# Altium PCB MainBoard.PcbDoc (part 1 of 2)
Units mm, origin at the board's own origin, x right, y up, seen from the top; angles counter-clockwise.
Board outline 110.87 x 110.11 mm, 4 copper layers (Top Layer, Signal Layer 1, Signal Layer 2, Bottom Layer), stack 0.971 mm thick; 104 components, 160 nets, 547 pads, 193 vias.
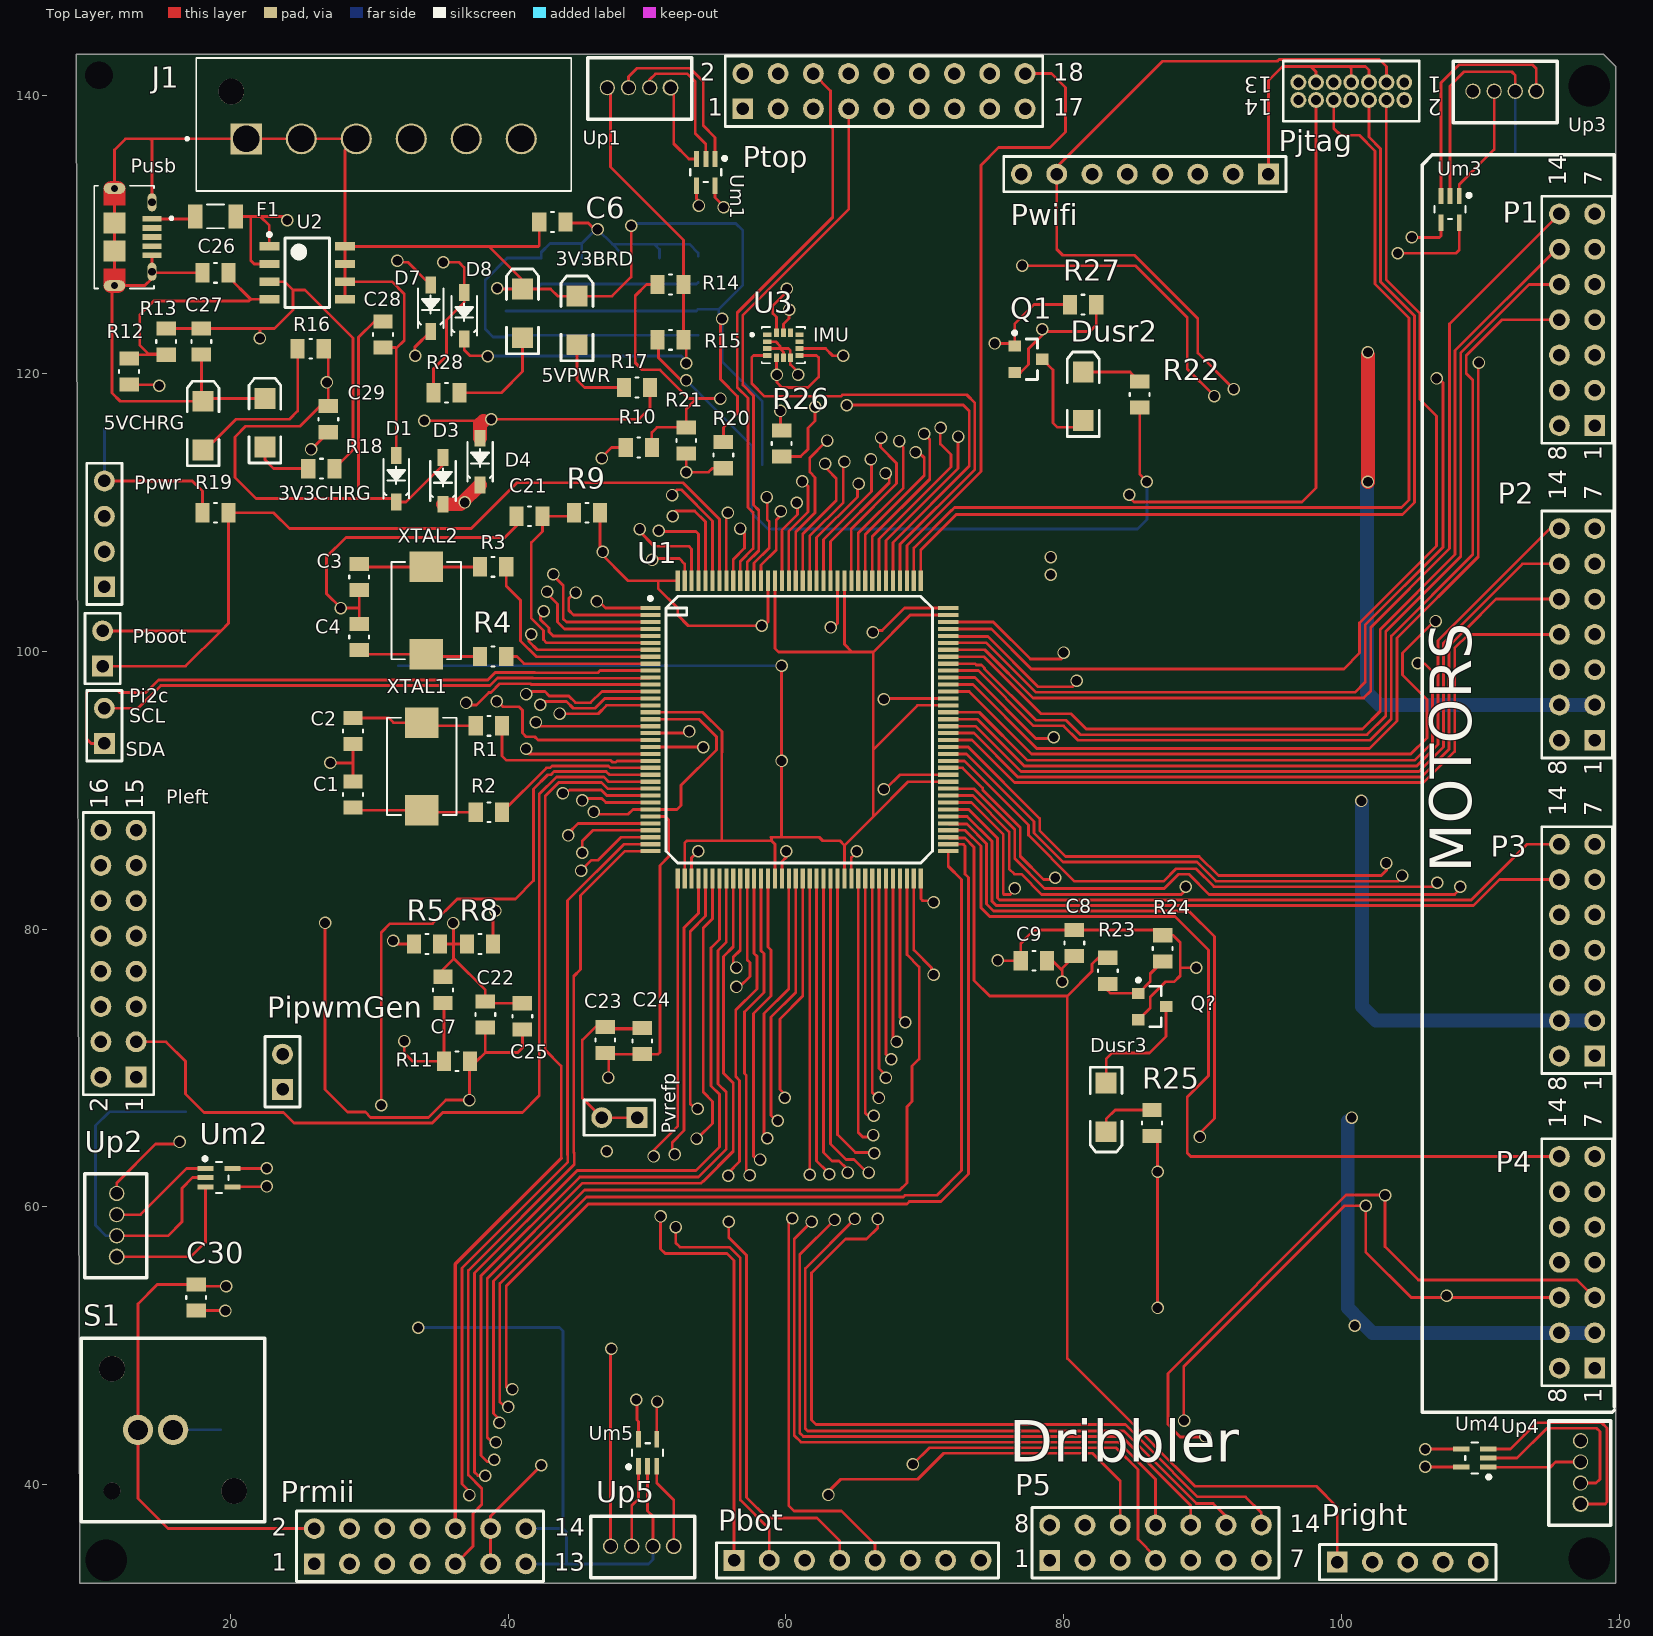
[diagram p0: Top Layer view]
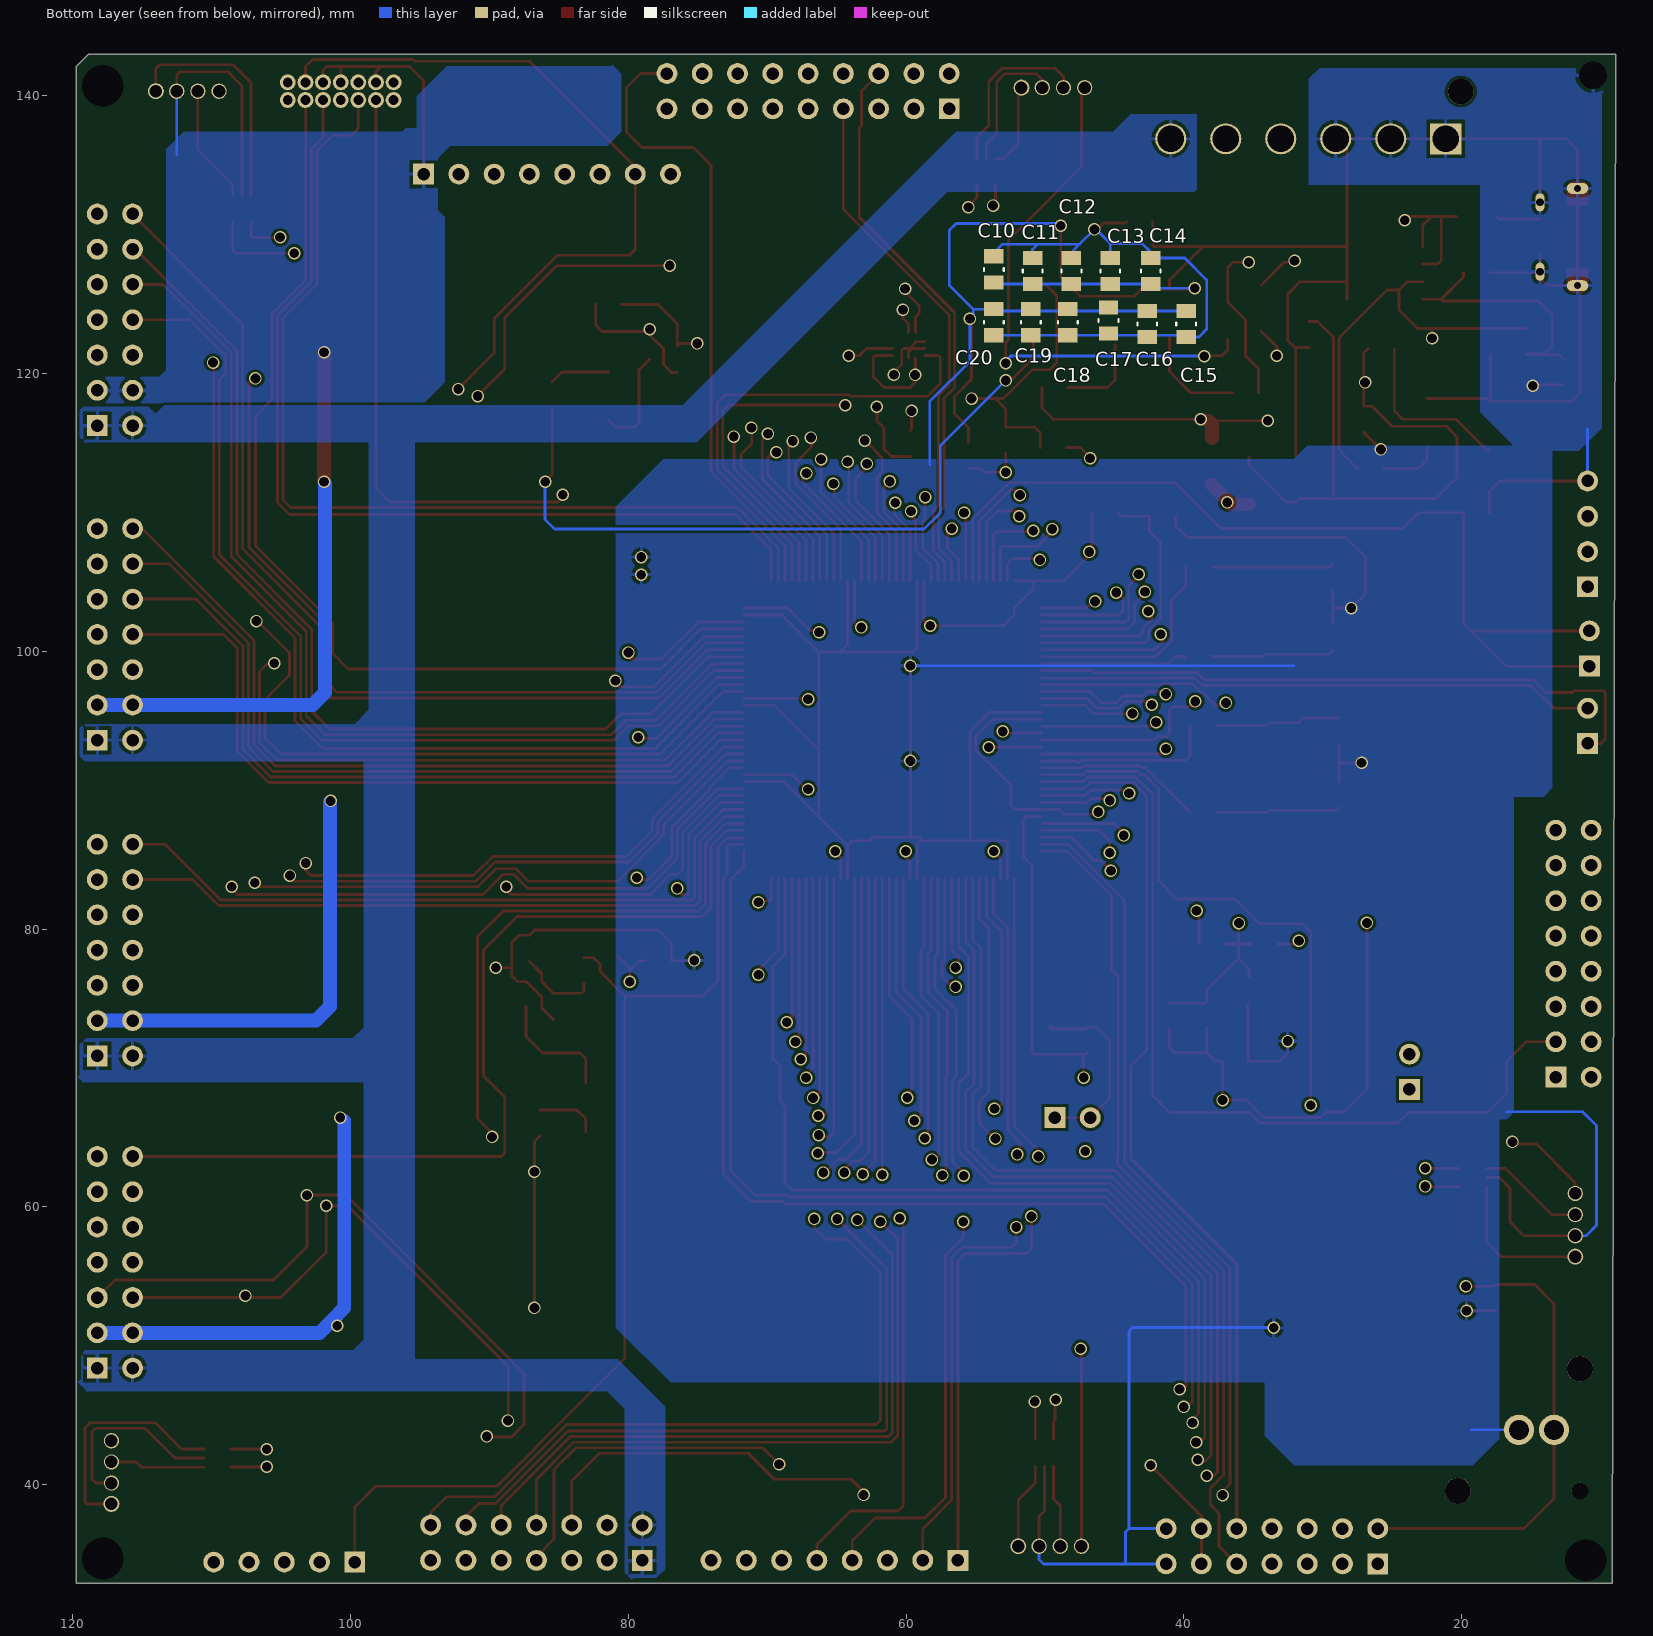
[diagram p1: Bottom Layer view, seen from below]
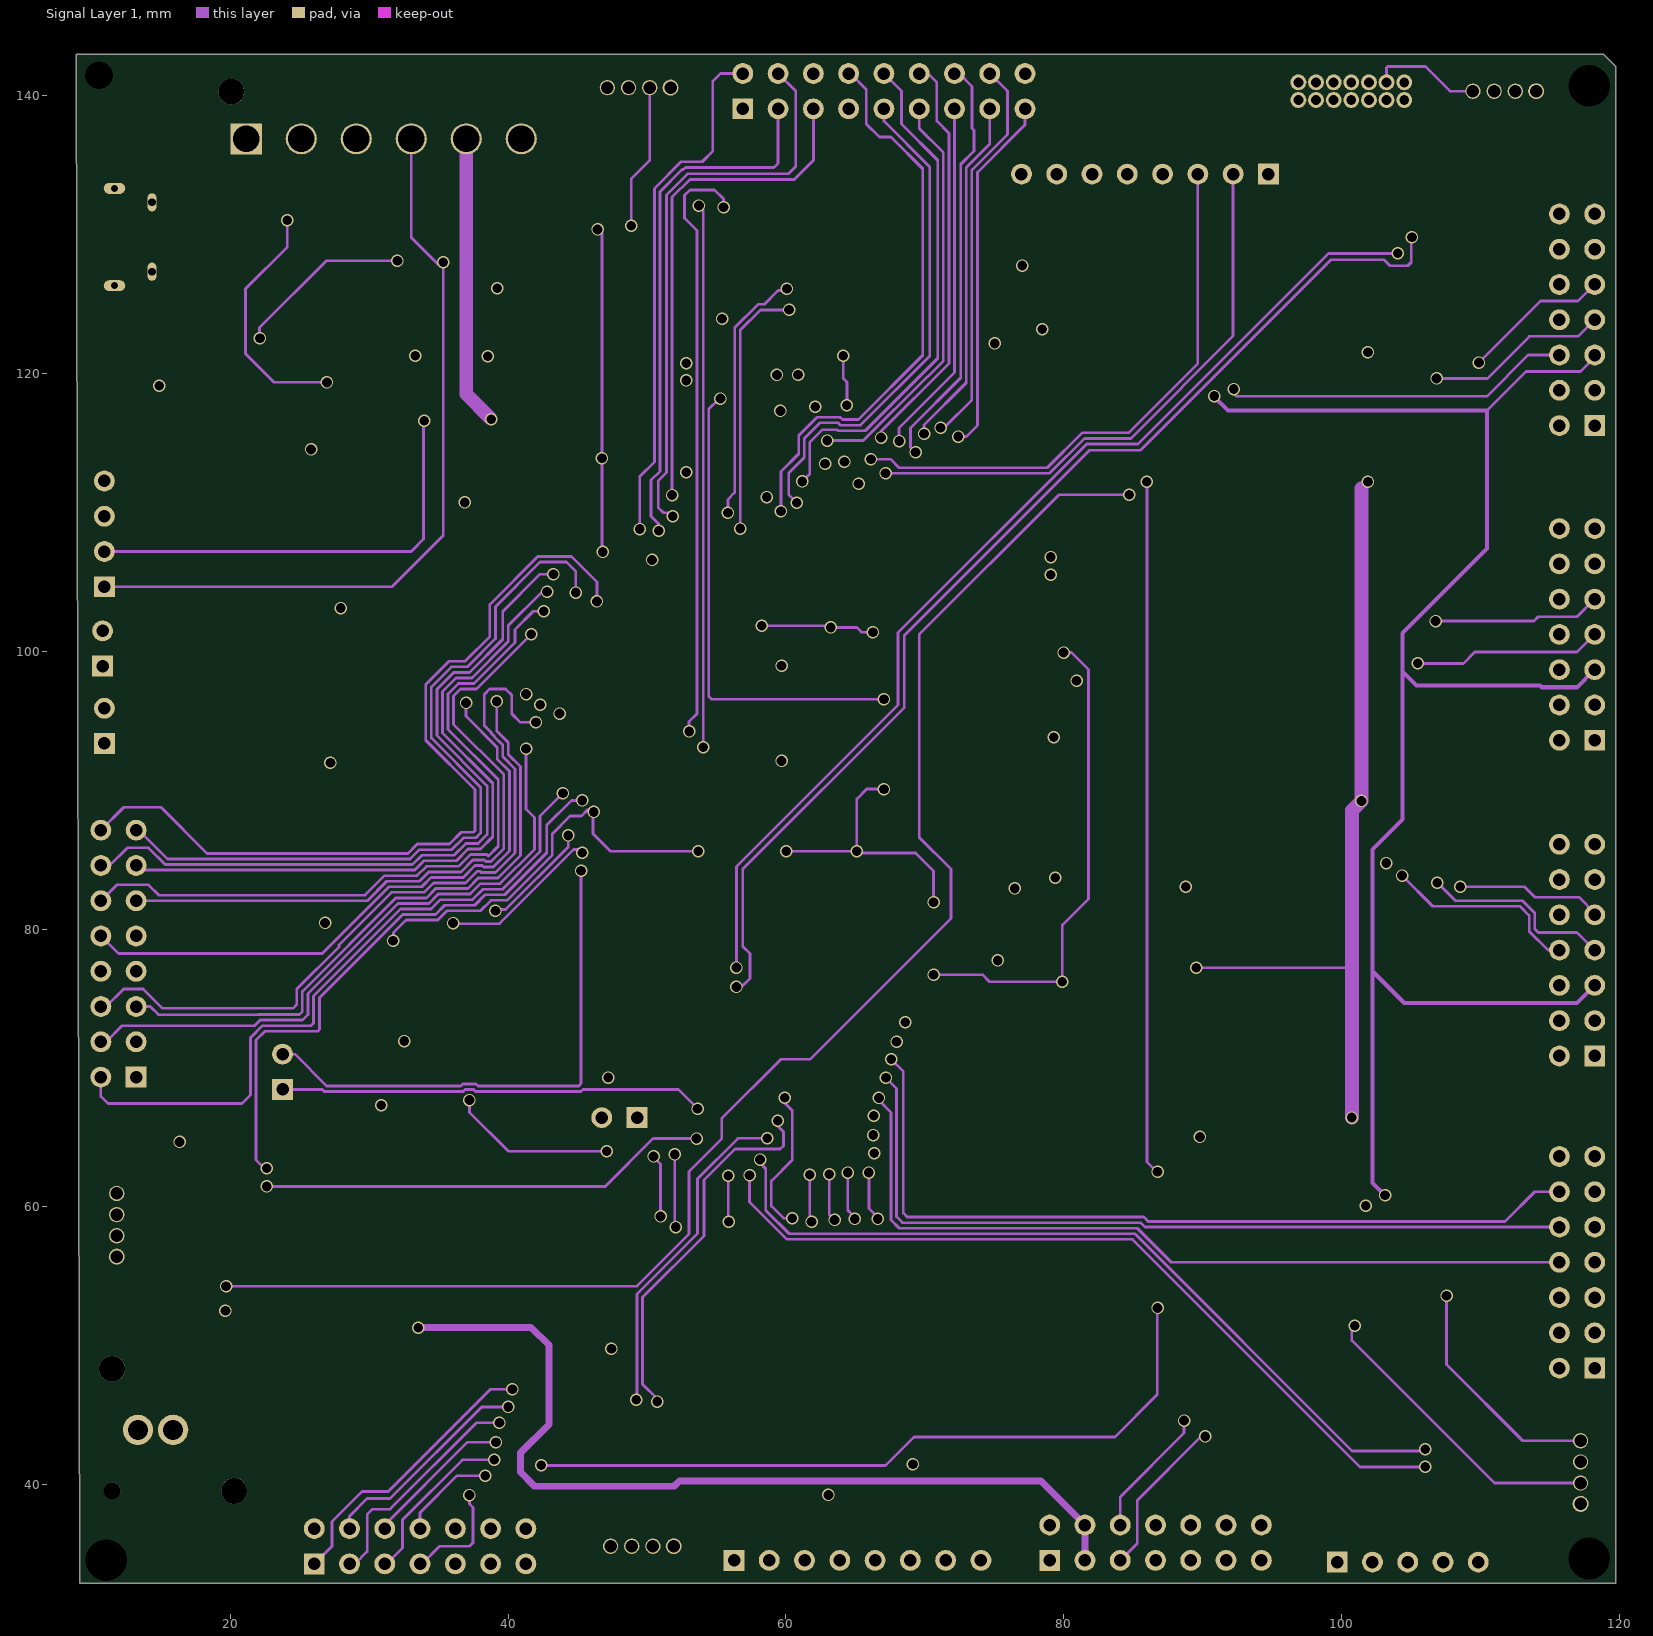
[diagram p2: Signal Layer 1]
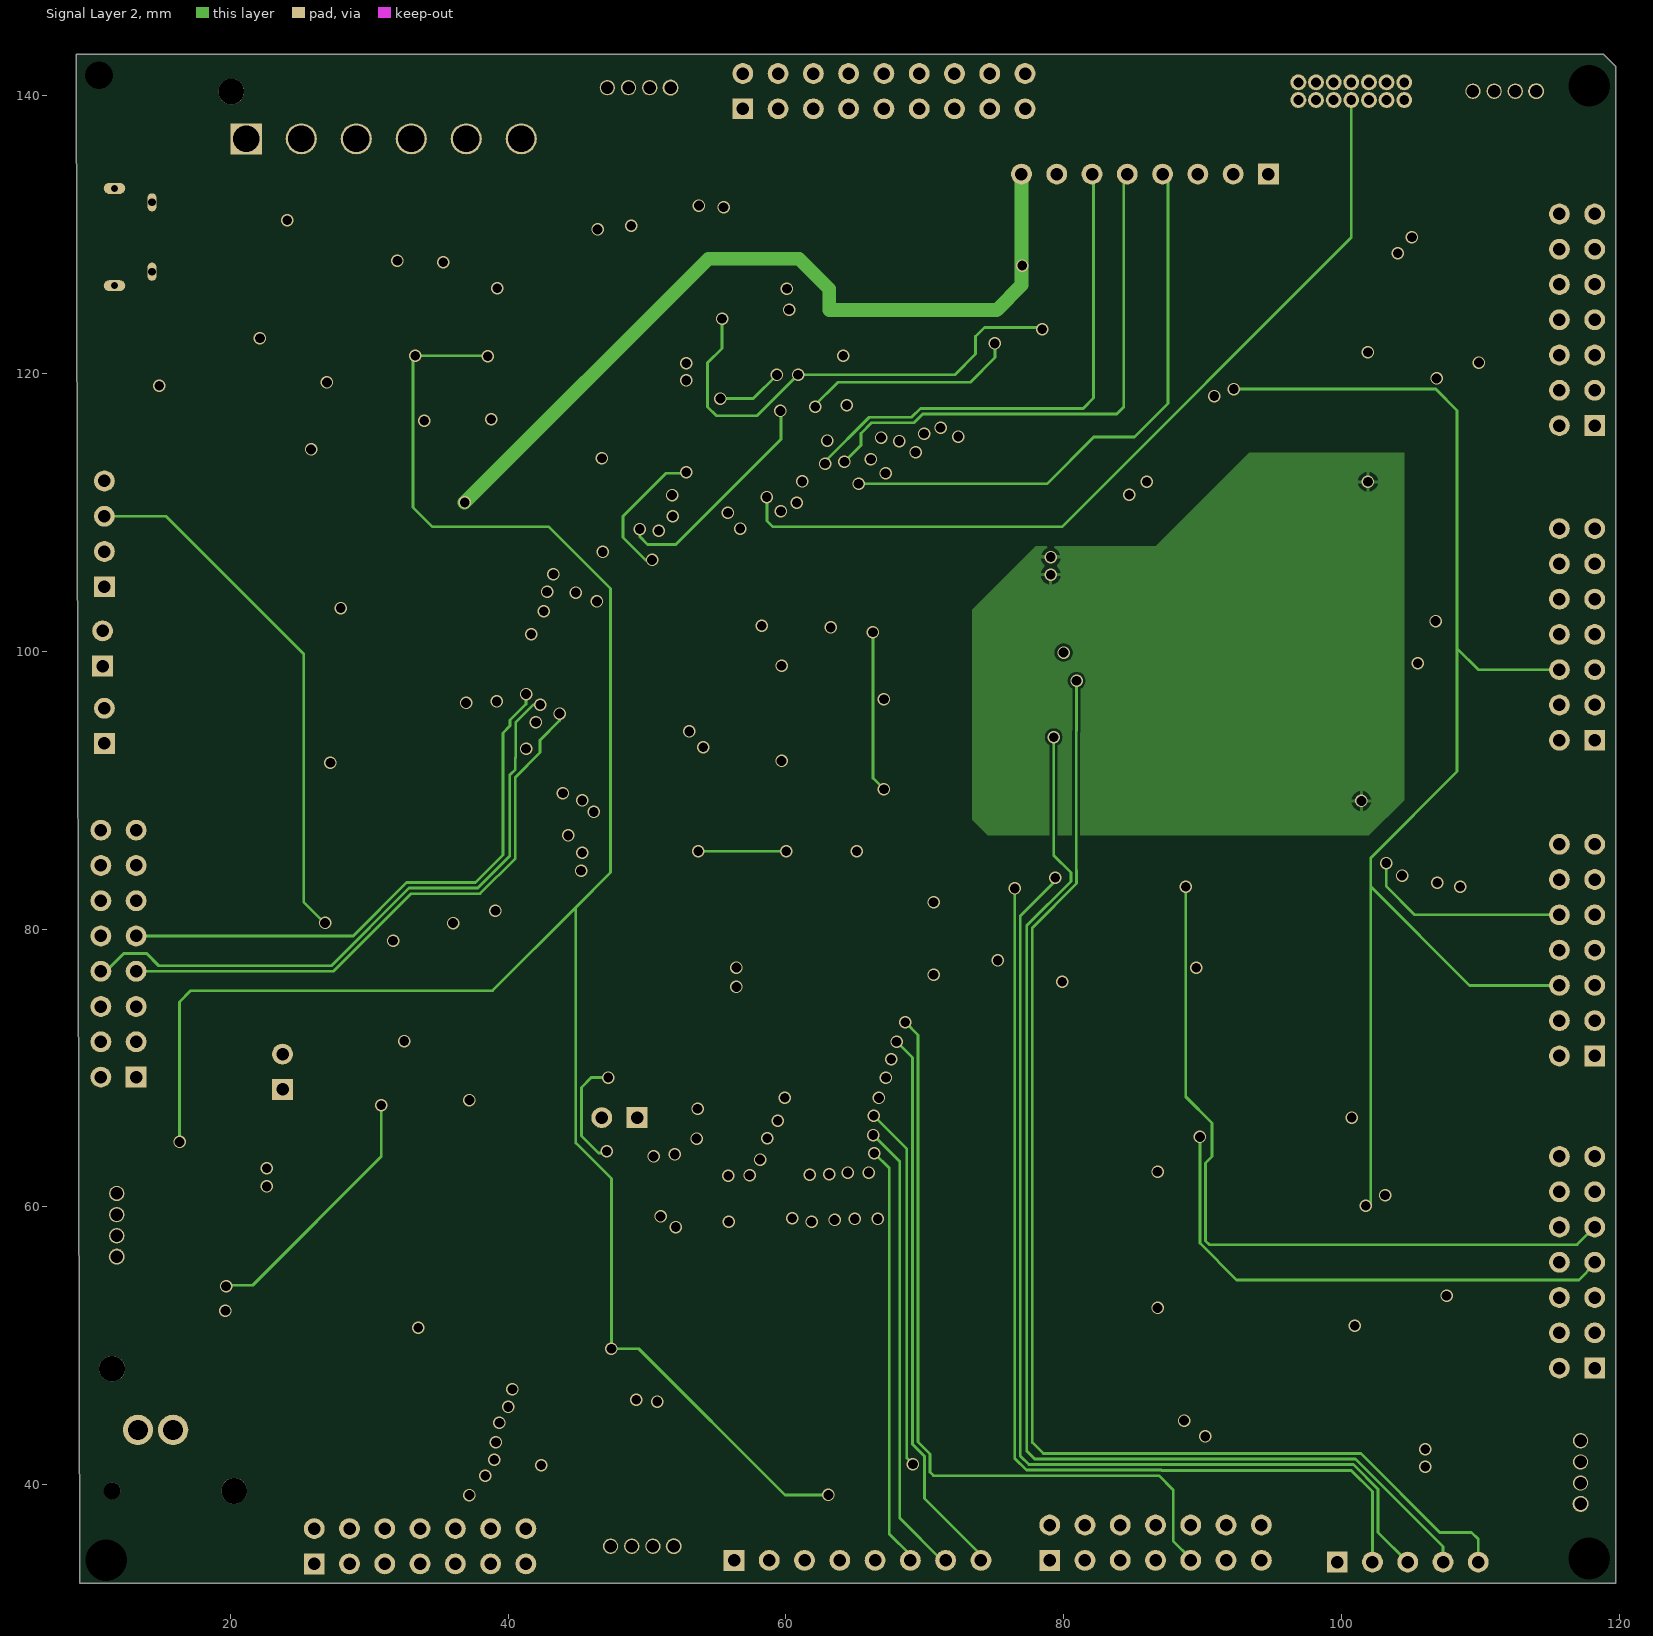
[diagram p3: Signal Layer 2]

## Layer stack, top to bottom
Top Solder: solder mask 0.0102, Solder Resist, Dk 3.5
Top Layer: signal copper 0.0356
Dielectric 1: dielectric 0.32, FR-4, Dk 4.8
Signal Layer 1: signal copper 0.036
Dielectric 2: dielectric 0.254, Dk 4.2
Signal Layer 2: signal copper 0.036
Dielectric 3: dielectric 0.254, Dk 4.2
Bottom Layer: signal copper 0.0356
Bottom Solder: solder mask 0.0102, Solder Resist, Dk 3.5

## Board outline
8.89,143.002 118.872,143.002 119.761,142.113 119.761,32.893 9.144,32.893

## Design rules (kind name [scope] priority, off if disabled: settings)
Clearance [All] p1: gap=0.2 ignorepadtopadclearanceinfootprint=FALSE except(0: Arc-Hole Track-Hole SMDPad-Hole THPad-Hole Via-Hole Fill-Hole Poly-Hole Region-Hole Text-Hole; 0.125: SMDPad-SMDPad SMDPad-THPad THPad-THPad)
HoleSize [All] p1: absolutevalues=TRUE maxlimit=4 minlimit=0.025 maxpercent=80.000 minpercent=20.000
MinimumSolderMaskSliver [All] p1: minsoldermaskwidth=0.021
PolygonConnect [All] p1: connectstyle=Relief reliefconductorwidth=0.254 reliefentries=4 polygonreliefangle="90 Angle" airgapwidth=0.254
RoomDefinition U_MCUUSB [InComponentClass('U_MCUUSB')] p1: confinementstyle=ConfineIn formatcopy=TRUE lockcomponents=FALSE outline 0,149.098 0,117.856 20.32,117.856 22.479,120.015 22.479,148.59 21.717,149.352 0.381,149.352
RoomDefinition U_MCUIOs [InComponentClass('U_MCUIOs')] p2: confinementstyle=ConfineIn formatcopy=TRUE lockcomponents=FALSE outline 5.969,144.526 5.969,30.226 123.063,30.226 123.19,30.099 123.19,144.145 123.317,144.272
RoomDefinition U_MCUCONN [InComponentClass('U_MCUCONN')] p3: confinementstyle=ConfineIn formatcopy=TRUE lockcomponents=FALSE outline 5.715,144.526 5.715,29.845 5.588,29.718 123.952,29.718 123.952,143.891 123.444,144.399
RoomDefinition U_MCU_PWR [InComponentClass('U_MCU_PWR')] p4: confinementstyle=ConfineIn formatcopy=TRUE lockcomponents=FALSE outline 5.207,147.701 5.207,26.67 4.953,26.416 125.222,26.416 125.222,145.415 124.714,145.923
RoomDefinition MainBoard_Top [InComponentClass('MainBoard_Top')] p5: confinementstyle=ConfineIn formatcopy=TRUE lockcomponents=FALSE outline 0,156.464 0.127,156.337 0.127,22.479 127.762,22.479 127.762,153.797 127.635,153.924
RoutingVias [All] p1: holewidth=0.711 width=1.27 viastyle="Through Hole" minholewidth=0.711 minwidth=1.27 maxholewidth=0.711 maxwidth=1.27
SilkToSilkClearance [All] p1: silktosilkclearance=0.05
SilkToSolderMaskClearance [IsPad] p1: minsilkscreentomaskgap=0.1 clearancetoexposedcopper=TRUE
SolderMaskExpansion [All] p1: expansion=0.102
Width [All] p1: maxlimit=2 minlimit=0.2 preferedwidth=0.2
26 further rules are at their usual default settings.

## Classes and differential pairs
component class U_MCUUSB: Pusb
component class U_MCUIOs: C1 C2 C3 C4 C30 HW? P1 P2 P3 P4 P5 Pbot Pi2c PipwmGen Pleft Pright Ptop Pwifi R1 R2 R3 R4 R19 R20 R21 S1 U1 U3 XTAL1 XTAL2
component class U_MCUCONN: Dusr2 Dusr3 J1 Pjtag Ppwr Prmii Q1 Q? R22 R23 R24 R25 R26 R27 Um1 Um2 Um3 Um4 Um5 Up1 Up2 Up3 Up4 Up5
component class U_MCU_PWR: 1 3V3BRD 3V3CHRG 5VCHRG 5VPWR C6 C7 C8 C9 C10 C11 C12 C13 C14 C15 C16 C17 C18 C19 C20 C21 C22 C23 C24 C25 C26 C27 C28 C29 D1 D3 D4 D7 D8 F1 Pvrefp R5 R8 R9 R10 R11 R12 R13 R14 R15 R16 R17 R18 R28 TP? U2
component class MainBoard_Top: Pboot

## Components (designator, comment, footprint, x,y, rotation, side; value= is the part's Value field where it differs from the comment)
3V3BRD "LED2" 3.2X1.6X1.1 41.029,124.333 r90 top (schematic designator Dled3v3BRD)
3V3CHRG "LED2" 3.2X1.6X1.1 22.479,116.459 r90 top (schematic designator Dled3V3CHRG)
5VCHRG "LED2" 3.2X1.6X1.1 18.034,116.256 r90 top (schematic designator Dled5VCHRG)
5VPWR "LED2" 3.2X1.6X1.1 44.958,123.825 r90 top (schematic designator Dled5VPWR)
C1 "5.6pF" 0805 28.829,89.681 r90 top
C2 "5.6pF" 0805 28.829,94.253 r270 top
C3 "5.1pF" 0805 29.268,105.345 r270 top
C4 "5.1pF" 0805 29.268,101.027 r90 top
C6 "100nF" 0805 43.18,130.914 r0 top
C7 "100nF" 0805 35.306,75.626 r90 top
C8 "2.2uF" 0805 80.772,78.994 r270 top
C9 "2.2uF" 0805 77.851,77.724 r0 top
C10 "4.7uF" 0805 53.68,127.508 r90 bottom
C11 "100nF" 0805 50.886,127.381 r90 bottom
C12 "100nF" 0805 48.092,127.381 r90 bottom
C13 "100nF" 0805 45.298,127.381 r90 bottom
C14 "100nF" 0805 42.377,127.381 r90 bottom
C15 "100nF" 0805 39.837,123.571 r270 bottom
C16 "100nF" 0805 42.631,123.571 r270 bottom
C17 "100nF" 0805 45.425,123.825 r270 bottom
C18 "100nF" 0805 48.346,123.698 r270 bottom
C19 "100nF" 0805 51.013,123.698 r270 bottom
C20 "100nF" 0805 53.68,123.698 r270 bottom
C21 "1uF" 0805 41.529,109.728 r0 top
C22 "1uF" 0805 38.354,73.848 r90 top
C23 "1uF" 0805 46.99,72.009 r90 top
C24 "100nF" 0805 49.657,71.933 r90 top
C25 "100nF" 0805 41.021,73.721 r90 top
C26 "470pF" 0805 18.923,127.254 r0 top
C27 "2.2uF" 0805 17.907,122.301 r90 top
C28 "1uF" 0805 30.988,122.809 r270 top
C29 "1nF" 0805 27.051,116.713 r90 top
C30 "100nF" 0805 17.526,53.467 r90 top
D1 "MMSZ5245B-TP" SOD-123 31.935,112.42 r90 top
D3 "SM5817PL-TP" SOD-123 35.306,112.268 r90 top
D4 "SM5817PL-TP" SOD-123 37.973,113.665 r90 top
D7 "SM5817PL-TP" SOD-123 34.417,124.714 r90 top
D8 "SM5817PL-TP" SOD-123 36.83,124.155 r90 top
Dusr2 "LED2" 3.2X1.6X1.1 81.407,118.364 r90 top
Dusr3 "LED2" 3.2X1.6X1.1 83.058,67.155 r270 top
F1 "Fuse 3A 1206" 1206 18.923,131.318 r0 top
J1 "CN HEADER VERT 6POS 3.96MM" "CN HDR 6POS 3.96MM" 21.14,136.906 r0 top
P1 "Motor1" HDR2X7_CEN 118.237,116.256 r90 top
P2 "Motor2" HDR2X7_CEN 118.237,93.599 r90 top
P3 "Motor3" HDR2X7_CEN 118.237,70.866 r90 top
P4 "Motor4" HDR2X7_CEN 118.237,48.387 r90 top
P5 "Motor5" HDR2X7_CEN 78.994,34.544 r0 top
Pboot "Header 2" HDR1X2 10.795,98.933 r90 top
Pbot "Bottom Side Connector - Extra Pins" HDR1X8 56.261,34.544 r0 top
Pi2c "Header 2" HDR1X2 10.922,93.365 r90 top
PipwmGen "Header 2" HDR1X2 23.749,68.453 r90 top
Pjtag "FTSH-107-01-L-D-K" "CN HDR JTAG" 100.711,140.325 r180 top
Pleft "Left Side Connector Extra Pins" HDR2X8 13.208,69.342 r90 top
Ppwr "Header 4" HDR1X4 10.922,104.648 r90 top
Pright "Right Side Connector - Extra Pins" HDR1X5 99.695,34.417 r0 top
Prmii "Header 7X2" HDR2X7 26.035,34.29 r0 top
Ptop "Top side Connector Extra Pins" HDR2X9 56.896,139.065 r0 top
Pusb "10118194-0001LF" "USB Micro B Receptacle" 11.661,129.834 r270 top
Pvrefp "Header 2" HDR1X2 49.276,66.421 r180 top
Pwifi "Header 8" HDR1X8 94.742,134.366 r180 top
Q1 "BSR14" ONSC-SOT-23-3-318-08_V 77.47,121.031 r0 top
Q? "BSR14" ONSC-SOT-23-3-318-08_V 86.376,74.422 r0 top
R1 "JUMPER" 0805 38.608,94.634 r0 top value=0
R2 "JUMPER" 0805 38.608,88.411 r0 top value=0
R3 "JUMPER" 0805 38.92,106.082 r0 top value=0
R4 "JUMPER" 0805 38.92,99.63 r0 top value=0
R5 "JUMPER" 0805 34.163,78.928 r180 top value=0
R8 "JUMPER" 0805 37.973,78.928 r180 top value=0
R9 "JUMPER" 0805 45.669,109.982 r0 top value=0
R10 "JUMPER" 0805 49.403,114.681 r0 top value=0
R11 "JUMPER" 0805 36.322,70.485 r180 top value=0
R12 "165k" 0805 12.7,120.142 r270 top
R13 "100k" 0805 15.367,122.297 r270 top
R14 "JUMPER" 0805 51.689,126.416 r0 top value=0
R15 "JUMPER" 0805 51.689,122.428 r0 top value=0
R16 "270" 0805 25.781,121.793 r0 top
R17 "270" 0805 49.276,118.999 r0 top
R18 "182" 0805 26.543,113.157 r0 top
R19 "10k" 0805 18.923,109.982 r0 top
R20 "10k" 0805 55.499,114.122 r270 top
R21 "10k" 0805 52.819,115.189 r270 top
R22 "270" 0805 85.471,118.491 r90 top
R23 "47k" 0805 83.185,76.998 r90 top
R24 "100k" 0805 87.122,78.613 r90 top
R25 "270" 0805 86.36,66.04 r90 top
R26 "47k" 0805 59.69,114.96 r90 top
R27 "100k" 0805 81.407,124.968 r0 top
R28 "182" 0805 35.56,118.618 r180 top
S1 "SPST-NO 0.3A 28V" PB300STQ 15.875,43.942 r0 top
U1 "STM32H743ZI" STM32H7 60.96,94.361 r0 top
U2 "LDO" "REG LIN POS ADJ 500MA 8SOIC" 25.527,127.254 r0 top
U3 "LSM6DSLTR" LGA-14 59.817,122.047 r0 top
Um1 "EMI" SOT-665 54.229,134.493 r270 top
Um2 "EMI" SOT-665 19.177,62.103 r0 top
Um3 "EMI" SOT-665 107.823,131.826 r270 top
Um4 "EMI" SOT-665 109.601,41.91 r180 top
Um5 "EMI" SOT-665 50.038,42.291 r90 top
Up1 "Encoder" EncoderConnector 48.768,140.462 r180 top value=N/A
Up2 "Encoder" EncoderConnector 11.684,59.333 r90 top value=N/A
Up3 "Encoder" EncoderConnector 111.101,140.208 r180 top value=N/A
Up4 "Encoder" EncoderConnector 117.094,41.529 r90 top value=N/A
Up5 "Encoder" EncoderConnector 48.998,35.433 r180 top value=N/A
XTAL1 "CRYSTAL 25.0000MHZ 8PF SMD" SMD-2 33.782,91.713 r90 top
XTAL2 "CRYSTAL 32.7680KHZ 12.5PF SMD" SMD-2 34.094,102.932 r90 top

## Footprints (in the part's own frame and the unit in brackets; to place one, negate y for a bottom-side part, rotate by r counter-clockwise, add the part's x,y. Pads: shape width x height; smd on the part's side, far side on the other; paste and mask are expansions set on the pad)
3.2X1.6X1.1 [mm]
  rect 1.5x1.5 smd: 1(-1.75,0) 2(1.75,0)
  silkscreen extent -2.9,-1.15 3.2,1.15
0805 [mil]
  rect 40x55 smd: 1(-37,0) 2(37,0)
  silkscreen extent -4,-28 4,28
1206 [mm]
  rect 1.05x1.72 smd: 1(-1.46,0) 2(1.46,0)
  silkscreen extent -0.62,-0.85 0.62,0.85
"CN HDR 6POS 3.96MM" [mm]
  rect 2.24x2.24 hole 1.89: 1(0,0)
  round 2.24 hole 1.89: 2(3.96,0) 3(7.92,0) 4(11.88,0) 5(15.84,0) 6(19.8,0)
  round 1.86 hole 1.86 unplated: None(-1.08,3.4)
  silkscreen extent -4.35,-3.76 23.41,5.82
"CN HDR JTAG" [mil] "CONN HEADER VERT 14POS 1.27MM"
  round 45 hole 27.95: 1(-150,-25.39) 2(-150,24.61) 3(-100,-25.39) 4(-100,24.61) 5(-50,-25.39) 6(-50,24.61) 7(0,-25.39) 8(0,24.61) 9(50,-25.39) 10(50,24.61) 11(100,-25.39) 12(100,24.61) 13(150,-25.39) 14(150,24.61)
  silkscreen extent -193,-86 193,85, body extent -175,-68 175,67, height 249
EncoderConnector [mm] "CONN HEADER R/A 4POS 1.5MM"
  round 1.1 hole 0.9: GND(-1.421,-0.127) VCC(1.627,-0.127) VIN2(0.103,-0.127)
  round 1.15 hole 0.9: VIN1(-2.921,-0.127)
  silkscreen extent -4.44,-2.29 3.06,2.16
HDR1X2 [mm] "Connector; Header; 2 Position"
  rect 1.5x1.5 hole 0.9: 1(0,0)
  round 1.5 hole 0.9: 2(2.54,0)
  silkscreen extent -1.27,-1.27 3.81,1.27
HDR1X4 [mm] "Connector; Header; 4 Position"
  rect 1.5x1.5 hole 0.9: 1(0,0)
  round 1.5 hole 0.9: 2(2.54,0) 3(5.08,0) 4(7.62,0)
  silkscreen extent -1.27,-1.27 8.89,1.27
HDR1X5 [mm] "Connector; Header; 5 Position"
  rect 1.5x1.5 hole 0.9: 1(0,0)
  round 1.5 hole 0.9: 2(2.54,0) 3(5.08,0) 4(7.62,0) 5(10.16,0)
  silkscreen extent -1.27,-1.27 11.43,1.27
HDR1X8 [mm] "Connector; Header; 8 Position"
  rect 1.5x1.5 hole 0.9: 1(0,0)
  round 1.5 hole 0.9: 2(2.54,0) 3(5.08,0) 4(7.62,0) 5(10.16,0) 6(12.7,0) 7(15.24,0) 8(17.78,0)
  silkscreen extent -1.27,-1.27 19.05,1.27
HDR2X7 [mm] "Connector; Header; 7x2 Position"
  rect 1.5x1.5 hole 0.9: 1(0,0)
  round 1.5 hole 0.9: 2(0,2.54) 3(2.54,0) 4(2.54,2.54) 5(5.08,0) 6(5.08,2.54) 7(7.62,0) 8(7.62,2.54) 9(10.16,0) 10(10.16,2.54) 11(12.7,0) 12(12.7,2.54) 13(15.24,0) 14(15.24,2.54)
  silkscreen extent -1.27,-1.27 16.51,3.81
HDR2X7_CEN [mm] "Connector; Header; 7x2 Position"
  rect 1.5x1.5 hole 0.9: 1(0,0)
  round 1.5 hole 0.9: 2(2.54,0) 3(5.08,0) 4(7.62,0) 5(10.16,0) 6(12.7,0) 7(15.24,0) 8(0,2.54) 9(2.54,2.54) 10(5.08,2.54) 11(7.62,2.54) 12(10.16,2.54) 13(12.7,2.54) 14(15.24,2.54)
  silkscreen extent -1.27,-1.27 16.51,3.81
HDR2X8 [mm] "Connector; Header; 8x2 Position"
  rect 1.5x1.5 hole 0.9: 1(0,0)
  round 1.5 hole 0.9: 2(0,2.54) 3(2.54,0) 4(2.54,2.54) 5(5.08,0) 6(5.08,2.54) 7(7.62,0) 8(7.62,2.54) 9(10.16,0) 10(10.16,2.54) 11(12.7,0) 12(12.7,2.54) 13(15.24,0) 14(15.24,2.54) 15(17.78,0) 16(17.78,2.54)
  silkscreen extent -1.27,-1.27 19.05,3.81
HDR2X9 [mm] "Connector; Header; 9x2 Position"
  rect 1.5x1.5 hole 0.9: 1(0,0)
  round 1.5 hole 0.9: 2(0,2.54) 3(2.54,0) 4(2.54,2.54) 5(5.08,0) 6(5.08,2.54) 7(7.62,0) 8(7.62,2.54) 9(10.16,0) 10(10.16,2.54) 11(12.7,0) 12(12.7,2.54) 13(15.24,0) 14(15.24,2.54) 15(17.78,0) 16(17.78,2.54) 17(20.32,0) 18(20.32,2.54)
  silkscreen extent -1.27,-1.27 21.59,3.81
LGA-14 [mm]
  rect 0.61x0.35 smd: 1(-1.16,0.75) 2(-1.16,0.25) 3(-1.16,-0.25) 4(-1.16,-0.75) 8(1.16,-0.75) 9(1.16,-0.25) 10(1.16,0.25) 11(1.16,0.75)
  rect 0.35x0.61 smd: 5(-0.5,-0.91) 6(0,-0.91) 7(0.5,-0.91) 12(0.5,0.91) 13(0,0.91) 14(-0.5,0.91)
  silkscreen extent -2.35,-1.3 1.55,1.3
ONSC-SOT-23-3-318-08_V [mm] "SOT23, 3-Leads, Body 2.92x1.3mm, Pitch 0.95mm"
  rect 0.9x0.8 smd: 1(-1,0.95) 2(-1,-0.95) 3(1,0)
  silkscreen extent -1.12,-1.46 0.65,2.02, body extent -0.65,-1.46 0.65,1.46, height 1.11
PB300STQ [mm] "SWITCH PUSH SPST-NO 0.3A 28V"
  round 2.175 hole 1.45: 1(0,0) 2(-2.54,0)
  round 1.86 hole 1.86 unplated: 3(-4.4,4.4) 5(4.4,-4.4)
  round 1.2 hole 1.2 unplated: 4(-4.4,-4.4)
  silkscreen extent -6.6,-6.6 6.6,6.6, body extent -6.2,-6.2 6.2,6.2, height 10.35
"REG LIN POS ADJ 500MA 8SOIC" [mm] "Linear Voltage Regulator IC  1 Output  500mA 8-SOIC"
  rect 1.45x0.6 smd: ADJ(-2.725,-1.905) EN(-2.725,1.905) GND(2.725,-1.905) GND(2.725,-0.635) GND(2.725,0.635) GND(2.725,1.905) IN(-2.725,0.635) OUT(-2.725,-0.635)
  silkscreen extent -2.85,-2.5 1.6,2.88, body extent -2,-2.5 2,2.5, height 1.75
SMD-2 [mm]
  rect 2.2x2.4 smd: 1(-3.15,0) 2(3.15,0)
  silkscreen extent -3.5,-2.5 3.5,2.5
SOD-123 [mil]
  rect 48x30 smd: A(66,0) C(-66,0)
  silkscreen extent -56,-36 56,36
SOT-665 [mil]
  rect 46x14 smd: 1(-38,26) 2(-38,0) 3(-38,-26) 4(38,-26) 5(38,26)
  silkscreen extent -45,-44 27,59
STM32H7 [mm] "STM32H743ZI 144 pin"
  rect 0.3x1.45 smd: BOOT0(-5.75,10.725) PA3(-8.75,-10.725) PA4(-7.25,-10.725) PA5(-6.75,-10.725) PA6(-6.25,-10.725) PA7(-5.75,-10.725) PA14(8.75,10.725) PA15(8.25,10.725) PB0(-4.25,-10.725) PB1(-3.75,-10.725) PB2(-3.25,-10.725) PB3(-3.25,10.725) PB4(-3.75,10.725) PB5(-4.25,10.725) PB6(-4.75,10.725) PB7(-5.25,10.725) PB8(-6.25,10.725) PB9(-6.75,10.725) PB10(7.25,-10.725) PB11(7.75,-10.725) PC4(-5.25,-10.725) PC5(-4.75,-10.725) PC10(7.75,10.725) PC11(7.25,10.725) PC12(6.75,10.725) PD0(6.25,10.725) PD1(5.75,10.725) PD2(5.25,10.725) PD3(4.75,10.725) PD4(4.25,10.725) PD5(3.75,10.725) PD6(2.25,10.725) PD7(1.75,10.725) PDR_ON(-8.25,10.725) PE0(-7.25,10.725) PE1(-7.75,10.725) PE7(1.75,-10.725) PE8(2.25,-10.725) PE9(2.75,-10.725) PE10(4.25,-10.725) PE11(4.75,-10.725) PE12(5.25,-10.725) PE13(5.75,-10.725) PE14(6.25,-10.725) PE15(6.75,-10.725) PF11(-2.75,-10.725) PF12(-2.25,-10.725) PF13(-0.75,-10.725) PF14(-0.25,-10.725) PF15(0.25,-10.725) PG0(0.75,-10.725) PG1(1.25,-10.725) PG9(1.25,10.725) PG10(0.75,10.725) PG11(0.25,10.725) PG12(-0.25,10.725) PG13(-0.75,10.725) PG14(-1.25,10.725) PG15(-2.75,10.725) VCAP(8.25,-10.725) VDD(-8.75,10.725) VDD(-7.75,-10.725) VDD(-2.25,10.725) VDD(-1.25,-10.725) VDD(2.75,10.725) VDD(3.75,-10.725) VDD(8.75,-10.725) VSS(-8.25,-10.725) VSS(-1.75,-10.725) VSS(-1.75,10.725) VSS(3.25,-10.725) VSS(3.25,10.725)
  rect 1.45x0.3 smd: NRST(-10.725,-3.25) PA0(-10.725,-7.75) PA1(-10.725,-8.25) PA2(-10.725,-8.75) PA8(10.725,4.75) PA9(10.725,5.25) PA10(10.725,5.75) PA11(10.725,6.25) PA12(10.725,6.75) PA13(10.725,7.25) PB12(10.725,-8.75) PB13(10.725,-8.25) PB14(10.725,-7.75) PB15(10.725,-7.25) PC0(-10.725,-3.75) PC1(-10.725,-4.25) PC2(-10.725,-4.75) PC3(-10.725,-5.25) PC6(10.725,2.75) PC7(10.725,3.25) PC8(10.725,3.75) PC9(10.725,4.25) PC13(-10.725,5.75) PC14(-10.725,5.25) PC15(-10.725,4.75) PD8(10.725,-6.75) PD9(10.725,-6.25) PD10(10.725,-5.75) PD11(10.725,-5.25) PD12(10.725,-4.75) PD13(10.725,-4.25) PD14(10.725,-2.75) PD15(10.725,-2.25) PE2(-10.725,8.75) PE3(-10.725,8.25) PE4(-10.725,7.75) PE5(-10.725,7.25) PE6(-10.725,6.75) PF0(-10.725,4.25) PF1(-10.725,3.75) PF2(-10.725,3.25) PF3(-10.725,2.75) PF4(-10.725,2.25) PF5(-10.725,1.75) PF6(-10.725,0.25) PF7(-10.725,-0.25) PF8(-10.725,-0.75) PF9(-10.725,-1.25) PF10(-10.725,-1.75) PG2(10.725,-1.75) PG3(10.725,-1.25) PG4(10.725,-0.75) PG5(10.725,-0.25) PG6(10.725,0.25) PG7(10.725,0.75) PG8(10.725,1.25) PH0(-10.725,-2.25) PH1(-10.725,-2.75) VBAT(-10.725,6.25) VCAP(10.725,7.75) VDD(-10.725,-5.75) VDD(-10.725,0.75) VDD(10.725,-3.25) VDD(10.725,8.75) VDD33USB(10.725,2.25) VDDA(-10.725,-7.25) VREF+(-10.725,-6.75) VSS(-10.725,1.25) VSS(10.725,-3.75) VSS(10.725,1.75) VSS(10.725,8.25) VSSA(-10.725,-6.25)
  silkscreen extent -10.85,-9.6 9.6,9.6, body extent -10,-10 10,10, height 1.6
"USB Micro B Receptacle" [mm] "CONN RCPT USB2.0 MICRO B SMD R/A"
  rect 0.4x1.35 smd: 1(-1.3,2.69) 2(-0.65,2.69) 3(0,2.69) 4(0.65,2.69) 5(1.3,2.69)
  oval 1.3x0.65 hole 0.55: S1(-2.5,2.69) S2(2.5,2.69)
  oval 0.775x1.55 hole 0.5: S3(-3.5,-0.01) S6(3.5,-0.01)
  rect 1.5x1.55 smd: S4(-1,-0.01) S5(1,-0.01)
  Top Layer region: 194 vertices and 0 holes, not listed, extent 2.3,-0.79 4,0.765
  Top Layer region: 194 vertices and 0 holes, not listed, extent -4,-0.785 -2.3,0.77
  silkscreen extent -3.7,-1.46 3.7,4.19, body extent -4,-2.74 4.04,2.79, height 2.87

## Part data
3V3BRD 3V3CHRG 5VCHRG 5VPWR Dusr2: library part "LED GREEN SMD", "Typical RED, GREEN, YELLOW, AMBER GaAs LED", Package=0603, Rating=2V, Digikey=160-1446-1-ND, Digikey Link=https://www.digikey.ca/products/en?keywords=160-1446-1-ND, MF="Lite-On Inc.", MP=LTST-C191KGKT
C1 C2: library part "CAP 5.6pF 0805", "CAP CER 5.6PF 50V C0G/NP0 0805", Package=0805, Rating=50V, Tolerance=5%, Digikey=399-9261-1-ND, Digikey Link=https://www.digikey.ca/product-detail/en/kemet/C0805C569D5GACTU/399-9261-1-ND/3522779, MF=KEMET, MP=C0805C569D5GACTU, Price="0,249 CAD"
C3 C4: library part "CAP 5.1pF 0805", "CAP CER 5.1PF 630V NP0 0805", Package=0805, Rating=50V, Tolerance=10%, Digikey=399-16524-1-ND, Digikey Link=https://www.digikey.ca/product-detail/en/kemet/C0805C519KBGAC7800/399-16524-1-ND/7917337, MF=KEMET, MP=C0805C519KBGAC7800, Price="0,493 CAD"
C6 C7 C11 C12 C13 C14 C15 C16 C17 C18 C19 C20 C24 C25 C30: library part "CAP 100nF 0805", "CAP CER 0.1UF 50V X7R 0805", Package=0805, Rating=50V, Tolerance=10%, Digikey=311-1140-1-ND, Digikey Link=https://www.digikey.ca/products/en?keywords=311-1140-1-ND, MF=Yageo, MP=CC0805KRX7R9BB104, Price="0,119 CAD"
C8 C9 C27: library part "CAP 2.2uF 0805", "CAP CER 1UF 50V X7R 0805", Package=0805, Rating=16V, Tolerance=10%, Digikey=399-3523-1-ND, Digikey Link=https://www.digikey.ca/products/en?keywords=399-3523-1-ND, MF=KEMET, MP=C0805C225K4RACTU, Price="0,461 CAD"
C10: library part "CAP 4.7uF 0805", "CAP CER 4.7UF 25V X5R 0805", Package=0805, Rating=16V, Temperature Coefficient=X7R, Tolerance=10%, Digikey=1276-2873-1-ND, Digikey Link=https://www.digikey.ca/product-detail/en/samsung-electro-mechanics/CL21B475KOFNNNE/1276-2873-1-ND/3890959, MF="Samsung Electro-Mechanics", MP=CL21B475KOFNNNE, Price="0,49 CAD"
C21 C22 C23 C28: library part "CAP 1uF 0805", "CAP CER 1UF 50V X7R 0805", Package=0805, Rating=50V, Tolerance=10%, Digikey=1276-1029-1-ND, Digikey Link=https://www.digikey.ca/product-detail/en/samsung-electro-mechanics/CL21B105KBFNNNE/1276-1029-1-ND/3889115, MF="Samsung Electro-Mechanics", MP=CL21B105KBFNNNE, Price="0,172 CAD"
C26: library part "CAP 470pF 0805", "CAP CER 470PF 50V C0G/NPO 0805", Package=0805, Rating=50V, Tolerance=5%, Digikey=311-1119-1-ND, Digikey Link=https://www.digikey.ca/products/en?keywords=311-1119-1-ND, MF=Yageo, MP=CC0805JRNPO9BN471, Price="0,135 CAD"
C29: library part "CAP 1nF 0805", "CAP CER 1000PF 50V X7R 0805", Package=0805, Rating=50V, Tolerance=10%, Digikey=311-1127-1-ND, Digikey Link=https://www.digikey.ca/products/en?keywords=311-1127-1-ND, MF=Yageo, MP=CC0805KRX7R9BB102, Price="0.1 CAD"
D1: "Zener Diode 15V 500mW ±5% Surface Mount SOD-123", Package="SOD-123 ON Semiconductor", Availability=Unavailable, ComponentLink1Description=digikey, ComponentLink1URL=https://www.digikey.ca/en/products/detail/micro-commercial-co/MMSZ5245B-TP/1793206, MF="ON Semiconductor", MP=MMSZ5224BT1G, Price=None, SnapEDA_Link=https://www.snapeda.com/parts/MMSZ5224BT1G/ON%20Semiconductor/view-part/230941/?ref=snap
D3 D4 D7 D8: "Diode Schottky 20V 1A Surface Mount SOD-123FL", Current Rating=1A, Package=SOD-123, Voltage Rating=20V, ComponentLink1Description=digikey, ComponentLink1URL=https://www.digikey.ca/product-detail/en/on-semiconductor/MBR0540T1G/MBR0540T1GOSCT-ND/917967, Digikey=SM5817PL-TPMSCT-ND, Digikey Link=https://www.digikey.ca/product-detail/en/micro-commercial-co/SM5817PL-TP/SM5817PL-TPMSCT-ND/1793410, MF="Micro Commercial Co", MP=SM5817PL-TP
Dusr3: library part "LED RED SMD", "Typical RED, GREEN, YELLOW, AMBER GaAs LED", Package=0603, Rating=1.8V, Digikey=160-1181-1-ND, Digikey Link=https://www.digikey.ca/products/en?keywords=160-1181-1-ND, MF="Lite-On Inc.", MP=LTST-C190CKT
F1: "FUSE 3.0A 63VAC/DC SLOW 1206", Rating=3A, Digikey=507-1896-6-ND, Digikey Link=https://www.digikey.ca/product-detail/en/bel-fuse-inc/0685T3000-01/507-1896-6-ND/4968212, MF="Bel Fuse Inc.", MP=0685T3000-01
J1: library part "CN HDR VERT 6POS 3.96MM", "Connector Header Through Hole 6 position 0.156\" (3.96mm)", Current Rating=7.5A, Voltage Rating=250VAC, Digikey=A99849-ND, Digikey Link=https://www.digikey.ca/product-detail/en/te-connectivity-amp-connectors/1877285-6/A99849-ND/2000097, MF="TE Connectivity", MP=1877285-6, SnapEDA_Link=https://www.snapeda.com/parts/1877285-6/TE%20Connectivity/view-part/2371244/?ref=snap
P1 P2 P3 P4 P5: library part "Header 7X2A", "Header, 7-Pin, Dual row", LatestRevisionDate=17-Jul-2002, LatestRevisionNote="Re-released for DXP Platform.", Publisher="Altium Limited"
Pboot Pi2c PipwmGen Pvrefp: "Header, 2-Pin", LatestRevisionDate=17-Jul-2002, LatestRevisionNote="Re-released for DXP Platform.", Publisher="Altium Limited"
Pbot: library part "Header 8", "Header, 8-Pin", LatestRevisionDate=17-Jul-2002, LatestRevisionNote="Re-released for DXP Platform.", Publisher="Altium Limited"
Pjtag: library part "CN HDR JTAG", "Connector Header Through Hole 14 position 0.050\" (1.27mm)", Rating=3.4A, ComponentLink1Description=Digikey, ComponentLink1URL=https://www.digikey.ca/product-detail/en/samtec-inc/FTSH-107-01-L-D-K/612-FTSH-107-01-L-D-K-ND/6693516, ComponentLink2Description=Datasheet, ComponentLink2URL=https://www.digikey.ca/en/datasheets/samtecinc/samtec-inc-ftsh-1xx-xx-xx-d-xx-xx-mkt, Digikey=612-FTSH-107-01-L-D-K-ND, Digikey Link=https://www.digikey.ca/product-detail/en/samtec-inc/FTSH-107-01-L-D-K/612-FTSH-107-01-L-D-K-ND/6693516, MF="Samtec Inc.", MP=FTSH-107-01-L-D-K, Price="5.14000 CAD"
Pleft: library part "Header 8X2", "Header, 8-Pin, Dual row", LatestRevisionDate=17-Jul-2002, LatestRevisionNote="Re-released for DXP Platform.", Publisher="Altium Limited"
Ppwr: "Header, 4-Pin", LatestRevisionDate=17-Jul-2002, LatestRevisionNote="Re-released for DXP Platform.", Publisher="Altium Limited"
Pright: library part "Header 5", "Header, 5-Pin", LatestRevisionDate=17-Jul-2002, LatestRevisionNote="Re-released for DXP Platform.", Publisher="Altium Limited"
Prmii: "Header, 7-Pin, Dual row", LatestRevisionDate=17-Jul-2002, LatestRevisionNote="Re-released for DXP Platform.", Publisher="Altium Limited"
Ptop: library part "Header 9X2", "Header, 9-Pin, Dual row", LatestRevisionDate=17-Jul-2002, LatestRevisionNote="Re-released for DXP Platform.", Publisher="Altium Limited"
Pusb: library part "USB Micro B Receptacle", "USB - micro B USB 2.0 Receptacle Connector 5 Position Surface Mount, Right Angle; Through Hole", Rating="100VAC 1.8A", ComponentLink1Description=Digikey, ComponentLink1URL=https://www.digikey.ca/product-detail/en/amphenol-icc-fci/10118194-0001LF/609-4618-1-ND/2785382, ComponentLink2Description=Datasheet, ComponentLink2URL=https://www.digikey.ca/en/datasheets/amphenol-fci/amphenol-fci-io-usb-micro, Digikey=609-4618-1-ND, Digikey Link=https://www.digikey.ca/product-detail/en/amphenol-icc-fci/10118194-0001LF/609-4618-1-ND/2785382, MF="Amphenol ICC (FCI)", MP=10118194-0001LF, Price="0.62000 CAD"
Pwifi: "Header, 8-Pin", LatestRevisionDate=17-Jul-2002, LatestRevisionNote="Re-released for DXP Platform.", Publisher="Altium Limited"
Q1 Q?: library part CMP-1048-00605-1, "Bipolar (BJT) Transistor NPN 40V 800mA 300MHz 350mW Surface Mount SOT-23-3", ComponentLink1Description="Manufacturer URL", ComponentLink1URL=http://www.onsemi.com/, ComponentLink2Description=Datasheet, ComponentLink2URL=http://www.onsemi.com/pub_link/Collateral/BSS64LT1-D.PDF, ComponentLink3Description="Package Specification", ComponentLink3URL=http://www.onsemi.cn/pub_link/Collateral/318-08.PDF, Digikey=BSR14TR-ND
R1 R2 R3 R4 R5 R8 R9 R10 R11 R14 R15: library part "RES 0 0805", "RES SMD 0 OHM JUMPER 1/8W 0805", Package=0805, Rating=0.125W, Digikey=311-0.0ARCT-ND, Digikey Link=https://www.digikey.ca/products/en?keywords=311-0.0ARCT-ND, MF=Yageo, MP=RC0805JR-070RL, Price="0.058 CAD"
R12: library part "RES 165k 0805", "165 kOhms ±1% 0.25W, 1/4W Chip Resistor 0805 (2012 Metric) Automotive AEC-Q200, Moisture Resistant Thick Film", Package=0805, Rating=0.25W, Digikey=2019-RK73H2ATTD1653FCT-ND, Digikey Link=https://www.digikey.ca/product-detail/en/koa-speer-electronics-inc/RK73H2ATTD1653F/2019-RK73H2ATTD1653FCT-ND/10235747, MF="KOA Speer Electronics, Inc.", MP=RK73H2ATTD1653F, Price="0.15 CAD"
R13 R24 R27: library part "RES 100k 0805", "RES SMD 100K OHM 1% 1/8W 0805", Package=0805, Rating=0.125W, Tolerance=1%, Digikey=311-100KCRCT-ND, Digikey Link=https://www.digikey.ca/products/en?keywords=311-100KCRCT-ND, MF=Yageo, MP=RC0805FR-07100KL, Price="0.058 CAD"
R16 R17 R22 R25: library part "RES 270 0805", "RES SMD 270 OHM 5% 1/8W 0805", Package=0805, Rating=0.125W, Digikey=311-270ARCT-ND, Digikey Link=https://www.digikey.ca/product-detail/en/yageo/RC0805JR-07270RL/311-270ARCT-ND/731238, MF=Yageo, MP=RC0805JR-07270RL, Price="0.054 CAD"
R18 R28: library part "RES 182 0805", "RES SMD 182 OHM 1% 1/8W 0805", Package=0805, Rating=0.125W, Tolerance=1%, Digikey=P182CCT-ND, Digikey Link=https://www.digikey.ca/product-detail/en/panasonic-electronic-components/ERJ-6ENF1820V/P182CCT-ND/118743, MF="Panasonic Electronic Components", MP=ERJ-6ENF1820V, Price="0.15 CAD"
R19 R20 R21: library part "RES 10k 0805", "RES SMD 10K OHM 1% 1/8W 0805", Package=0805, Rating=0.125W, Tolerance=1%, Digikey=311-10.0KCRCT-ND, Digikey Link=https://www.digikey.ca/products/en?keywords=311-10.0KCRCT-ND, MF=Yageo, MP=RC0805FR-0710KL, Price="0.061 CAD"
R23 R26: library part "RES 47k 0805", "RES SMD 47K OHM 1% 1/8W 0805", Package=0805, Rating=0.125W, Tolerance=1%, Digikey=311-47.0KCRCT-ND, Digikey Link=https://www.digikey.ca/product-detail/en/yageo/RC0805FR-0747KL/311-47.0KCRCT-ND/730920, MF=Yageo, MP=RC0805FR-0747KL, Price="0.061 CAD"
S1: library part "SW PUSH NO", "Pushbutton Switch SPST-NO Standard Through Hole", Rating="28V 0.3A", ComponentLink1Description=Digikey, ComponentLink1URL=https://www.digikey.ca/product-detail/en/e-switch/PB300STQ/EG5398-ND/6126493, ComponentLink2Description=Datasheet, ComponentLink2URL=https://sten-eswitch-13110800-production.s3.amazonaws.com/system/asset/product_line/data_sheet/222/PB300.pdf, Digikey=EG5398-ND, Digikey Link=https://www.digikey.ca/product-detail/en/e-switch/PB300STQ/EG5398-ND/6126493, MF=E-Switch, MP=PB300STQ, Price="3.40000 CAD"
U1: Package="144-LQFP (20x20)", Digikey=497-17721-ND, Digikey Link=https://www.digikey.ca/product-detail/en/stmicroelectronics/STM32H743ZIT6/497-17721-ND/7809238, MF=STMicroelectronics, MP=STM32H743ZIT6
U2: library part "REG LIN POS ADJ", "Linear Voltage Regulator IC  1 Output  500mA 8-SOIC", Package="8 SOIC", Rating=500mA, Digikey=296-21569-1-ND, Digikey Link=https://www.digikey.ca/product-detail/en/texas-instruments/TL5209DR/296-21569-1-ND/1427137, MF="Texas Instruments", MP=TL5209DR, Price="1.548 CAD"
U3: "Accelerometer, Gyroscope, Temperature, 6 Axis Sensor I²C, SPI Output", Package="LGA-14 STMicroelectronics", Availability=Unavailable, MF=STMicroelectronics, MP=LSM6DSLTR, Price=None, SnapEDA_Link=https://www.snapeda.com/parts/LSM6DSLTR/STMicroelectronics/view-part/550517/?ref=snap
Um1 Um2 Um3 Um4 Um5: library part IP4256CZ5-W, "RC (Pi) EMI Filter 2nd Order Low Pass 2 Channel R = 100Ohms, C = 19pF (Total)  SOT-665", Package=SOT-665, Digikey=1727-4718-1-ND, Digikey Link=https://www.digikey.ca/product-detail/en/nexperia-usa-inc/IP4256CZ5-W115/1727-4718-1-ND/2531158, MF="Nexperia USA Inc.", MP=IP4256CZ5-W,115, Price="0.17 CAD", SnapEDA_Link=https://www.snapeda.com/parts/IP4256CZ5-W/Nexperia%20USA%20Inc./view-part/3605439/?ref=snap
Up1 Up2 Up3 Up4 Up5: library part "Encoder Connector", "CONN HEADER R/A 4POS 1.5MM", Package=N/A, Rating=1A, Digikey=455-1671-ND, Digikey Link=https://www.digikey.ca/products/en?keywords=455-1671-ND, MF="JST Sales America Inc.", MP=S4B-ZR(LF)(SN), Price="0.324 CAD"
XTAL1: library part "XTAL 25MHZ 8PF SMD", "25MHz ±50ppm Crystal 8pF 70 Ohms 2-SMD, No Lead", Frequency=25MHz, Load Capacitance=8pF, Package="2-SMD, No Lead", Digikey=644-1041-1-ND, Digikey Link=https://www.digikey.ca/product-detail/en/ndk-america-inc/NX5032GA-25.000000MHZ-LN-CD-1/644-1041-1-ND/1128913, ESR="70 Ohms", MF="NDK America, Inc.", MP=NX5032GA-25.000000MHZ-LN-CD-1, Price="0.95 CAD"
XTAL2: library part "XTAL 32.7680KHZ 12.5PF SMD", "32.768kHz ±20ppm Crystal 12.5pF 70 kOhms 2-SMD, No Lead", Frequency=32.768kHz, Load Capacitance=12.5pF, Package="2-SMD, No Lead", ComponentLink1Description=Digikey, ComponentLink1URL=https://www.digikey.ca/en/products/detail/ndk-america-inc/NX3215SA-32-768K-STD-MUA-8/2261469, ComponentLink2Description=Datasheet, ComponentLink2URL=https://media.digikey.com/datasheets/production/702868/1/NX3215SA-32-768K-STD-MUA-8.html, Digikey=644-1156-1-ND, Digikey Link=https://www.digikey.ca/en/products/detail/ndk-america-inc/NX3215SA-32-768K-STD-MUA-8/2261469?s=N4IgTCBcDaIGwBYEFoCMqCsc3IHIBEQBdAXyA, ESR="70 kOhms", MF="NDK America, Inc.", MP=NX3215SA-32.768K-STD-MUA-8, Price="1.04000 CAD"

## Free pads (board coordinates)
  round 1.524 hole 2: 1(10.541,141.478)
  round 1.524 hole 3: 1(11.049,34.544) 1(117.856,34.671) 1(117.856,140.716)

## Via types
v1: diameter 0.9, hole 0.7, Top Layer to Bottom Layer, 193 vias

## Nets (pads, with @x,y where several pads share a name; then routed paths per layer and width w, separated by ;. In a path a pad name is that pad's centre, name@x,y a point inside that pad or via, vN(x,y) a via of type N, cw(c..) or ccw(c..) an arc to the next point about the centre after c; other vN are vias at no path point)
3V3: D7.C D8.C P1.10 P2.10 P3.10 P4.10 P5.10 Pjtag.3 Pwifi.7 R14.2 R15.2 Up1.VCC Up2.VCC Up3.VCC Up4.VCC Up5.VCC | length 492.2
  Top Layer w0.2: Up2.VCC@11.811,60.96 11.811,61.722 14.605,64.516 v1@16.129,64.516 ; v1@33.274,121.412 33.274,121.895 D7.C@34.417,123.038 ; D8.C@36.83,122.479 36.83,121.717 37.262,121.285 v1@38.481,121.285 ; Up5.VCC@47.371,35.56 v1@47.371,49.657 ; Up1.VCC@47.371,140.589 47.371,134.874 52.629,129.616 R14.2@52.629,126.416 R15.2@52.629,122.428 52.819,122.238 v1(52.819,120.739) ; v1@63.119,39.556 63.949,40.386 69.494,40.386 71.361,42.253 82.08,42.253 84.074,40.259 P5.10@84.074,37.084 ; v1@88.646,44.577 88.646,48.514 100.213,60.081 v1(101.747,60.081) 101.747,56.749 105.029,53.467 P4.10@115.697,53.467 ; v1(92.248,118.887) 89.662,121.473 89.662,123.952 85.09,128.524 79.934,128.524 79.502,128.956 Pwifi.7@79.502,134.366 79.502,134.874 87.122,142.494 95.377,142.494 95.504,142.621 102.743,142.621 103.251,142.113 Pjtag.3@103.251,140.97
  Signal Layer 1 w0.2: P5.10@84.074,37.084 84.074,39.116 88.666,43.708 v1(88.666,44.606) ; v1@92.075,118.745 92.456,118.364 110.475,118.364 113.447,121.336 P1.10@115.697,121.336 ; Pjtag.3@103.251,140.97 103.251,142.04 103.324,142.113 106.045,142.113 107.823,140.335 Up3.VCC@109.474,140.335 ; v1(107.569,53.594) 107.569,48.641 113.054,43.156 Up4.VCC@117.221,43.156
  Signal Layer 2 w0.2: v1(16.332,64.673) 16.332,74.752 17.145,75.565 38.862,75.565 44.871,81.574 ; v1@38.354,121.285 v1(33.299,121.285) 33.147,121.133 33.147,110.363 34.544,108.966 42.926,108.966 47.371,104.521 47.371,84.074 44.871,81.574 ; v1(63.059,39.254) 59.933,39.254 49.403,49.784 v1(47.437,49.784) 47.437,62.037 44.871,64.603 44.871,81.574 ; v1(92.248,118.887) 106.792,118.887 108.331,117.348 108.331,100.203 ; v1@101.854,60.071 102.108,60.325 102.108,83.058 ; P3.10@115.697,75.946 109.22,75.946 102.108,83.058 ; P2.10@115.697,98.679 109.855,98.679 108.331,100.203 ; 102.108,83.058 102.108,85.121 108.331,91.344 108.331,100.203
  Bottom Layer w0.2: v1(38.531,121.257) 52.466,121.257 v1@52.819,120.904
3V3_PER: Prmii.11 Prmii.12 R15.1 R22.1 R25.1 | length 176.3
  Top Layer w0.2: Prmii.11@38.735,34.29 Prmii.12@38.735,36.83 38.735,37.719 v1@42.266,41.25 ; R15.1@50.749,122.428 50.833,122.344 50.833,121.137 52.463,119.507 v1(52.832,119.507) ; R22.1@85.471,117.551 85.471,112.776 v1@85.979,112.268 ; R25.1@86.36,65.1 86.761,64.699 v1(86.761,52.715)
  Signal Layer 1 w0.2: v1(42.372,41.383) 67.164,41.383 69.215,43.434 83.693,43.434 86.741,46.482 v1@86.741,52.578 ; v1(85.992,112.206) 85.992,63.233 v1@86.614,62.611
  Bottom Layer w0.2: v1(52.832,119.507) 57.531,114.808 57.531,109.982 58.706,108.807 85.312,108.807 85.992,109.487 v1(85.992,112.206)
  other v1: 86.761,62.528
3V3_PWR_BRD: D8.A J1.4 Ppwr.1 R28.2 | length 67.3
  Top Layer w0.2: R28.2@34.62,118.618 34.62,120.345 35.56,121.285 35.56,123.862 36.83,125.132 D8.A@36.83,125.832 36.83,127.635 36.449,128.016 v1(35.331,128.016)
  Signal Layer 1 w0.2: Ppwr.1@10.922,104.648 31.623,104.648 35.331,108.356 v1(35.331,128.016) ; J1.4@33.02,136.906 33.02,129.794 34.925,127.889 v1@35.179,127.889
3V3_USB_CHRG: C27.2 D7.A R13.1 R18.2 U2.OUT | length 44.9
  Top Layer w0.2: R13.1@15.367,123.237 15.371,123.241 C27.2@17.907,123.241 22.225,123.241 ; v1(22.123,122.535) 22.123,123.139 22.225,123.241 ; U2.OUT@22.802,126.619 23.905,126.619 24.511,126.013 ; R18.2@27.483,113.157 28.829,114.503 28.829,122.555 25.371,126.013 24.511,126.013 ; v1@32.131,128.016 32.791,128.016 D7.A@34.417,126.39 ; 22.225,123.241 23.165,123.241 24.511,124.587 24.511,126.013
  Signal Layer 1 w0.2: v1@22.098,122.809 22.098,123.317 26.904,128.123 v1(32.029,128.123)
3V3_VDD: R10.2 R14.1 R21.1 U1.VDD33USB U3.5 U3.8 | length 71.7
  Top Layer w0.2: R10.2@50.343,114.681 50.343,115.748 50.724,116.129 R21.1@52.819,116.129 52.819,117.462 53.556,118.199 ; R14.1@50.749,126.416 49.962,126.416 49.149,125.603 49.149,120.777 49.657,120.269 50.927,120.269 52.997,118.199 53.556,118.199 ; v1(55.285,118.199) 53.556,118.199 ; v1@59.317,120.023 U3.5@59.317,121.137 ; v1(59.349,119.901) 59.349,119.352 59.702,118.999 61.595,118.999 62.357,119.761 62.357,121.15 62.21,121.297 U3.8@60.977,121.297 ; v1@67.092,96.611 U1.VDD33USB@71.685,96.611
  Signal Layer 1 w0.2: v1@55.118,118.11 54.445,117.437 54.445,96.754 54.645,96.554 v1(67.056,96.554)
  Signal Layer 2 w0.2: v1(55.285,118.199) 57.647,118.199 v1(59.349,119.901)
5V: D3.C D4.C P1.3 P2.3 P3.3 P4.3 P5.3 Pwifi.8 | length 263.4
  Top Layer w0.2: v1@77.089,127.762 85.17,127.762 88.9,124.032 88.9,120.33 v1(90.851,118.379) ; v1@90.17,43.434 88.392,43.434 87.503,44.323 87.503,48.006 100.34,60.843 v1(103.144,60.843) 103.144,57.13 105.537,54.737 116.967,54.737 P4.3@118.237,53.467
  Top Layer w1: D3.C@35.306,110.592 36.576,110.592 D4.C@37.973,111.989
  Signal Layer 1 w0.2: P5.3@84.074,34.544 85.294,35.764 85.294,38.857 89.9,43.463 v1(90.19,43.463) ; 110.49,117.348 113.284,120.142 117.221,120.142 118.237,121.158 P1.3@118.237,121.336 ; 114.3,97.536 114.427,97.409
  Signal Layer 1 w0.3: v1@90.805,118.364 91.821,117.348 110.49,117.348 110.49,107.404 104.394,101.308 104.394,98.552 ; v1@103.124,60.833 102.235,61.722 102.235,76.962 ; 114.3,97.536 105.41,97.536 104.394,98.552 ; 114.427,97.409 116.967,97.409 P2.3@118.237,98.679 ; P3.3@118.237,75.946 116.967,74.676 104.521,74.676 102.235,76.962 ; 102.235,76.962 102.235,85.725 104.394,87.884 104.394,98.552
  Signal Layer 2 w1: v1(36.868,110.719) 54.419,128.27 60.929,128.27 63.119,126.08 63.119,124.587 75.184,124.587 76.962,126.365 Pwifi.8@76.962,134.366
  other v1: 77.008,127.777
5V_PWR_BRD: D4.A J1.5 Ppwr.2 R17.2 | length 72.1
  Top Layer w0.2: v1(33.947,116.6) 38.213,116.6 38.653,116.6 v1(38.773,116.72) 49.41,116.72 50.216,117.526 R17.2@50.216,118.999
  Top Layer w1: D4.A@37.973,115.341 37.973,116.36 38.213,116.6
  Signal Layer 1 w0.2: Ppwr.2@10.922,107.188 33.02,107.188 33.909,108.077 v1@33.909,116.586
  Signal Layer 1 w1: J1.5@36.98,136.906 36.98,118.518 v1@38.658,116.84
5V_USB_CHRG: C28.1 C29.2 D1.C D3.A F1.2 R16.2 U2.EN U2.IN | length 74.2
  Top Layer w0.2: F1.2@20.383,131.318 21.463,131.318 ; U2.IN@22.802,127.889 21.717,127.889 21.463,128.143 21.463,131.318 ; U2.EN@22.802,129.159 22.802,130.665 22.149,131.318 ; v1@24.003,131.191 24.003,131.318 22.149,131.318 ; R16.2@26.721,121.793 27.051,121.463 C29.2@27.051,117.653 26.467,117.653 25.019,116.205 21.082,116.205 20.32,115.443 20.32,112.522 21.844,110.998 29.21,110.998 ; C28.1@30.988,123.749 30.365,123.749 29.229,122.613 29.229,111.017 29.21,110.998 ; D3.A@35.306,113.944 35.306,113.411 32.639,110.744 D1.C@31.935,110.744 31.681,110.998 29.21,110.998 ; 21.463,131.318 22.149,131.318
  Signal Layer 1 w0.2: v1(24.097,131.044) 24.097,129.126 21.082,126.111 21.082,121.427 23.129,119.38 v1@26.67,119.38
  other v1: 26.949,119.36
ADC1_INP2: U1.PF11 Um4.5 | length 82.9
  Top Layer w0.2: v1@57.277,62.484 57.15,62.611 57.15,69.469 57.023,69.596 57.023,74.041 58.42,75.438 58.42,78.232 58.21,78.442 U1.PF11@58.21,83.636 ; v1(106.045,41.275) 108.61,41.275 Um4.5@108.636,41.25
  Signal Layer 1 w0.2: v1(57.378,62.272) 57.378,60.351 60.071,57.658 84.963,57.658 101.346,41.275 v1@105.918,41.275
ADC1_INP5: U1.PB1 Um3.4 | length 92
  Top Layer w0.2: v1@56.434,75.819 56.642,75.819 57.404,76.581 57.404,77.597 57.21,77.791 U1.PB1@57.21,83.636 ; v1(105.075,129.809) 107.051,129.809 107.163,129.921 Um3.4@107.163,130.861
  Signal Layer 1 w0.2: v1(56.434,75.834) 56.784,75.834 57.404,76.454 57.404,78.232 56.888,78.748 56.888,84.313 68.526,95.951 68.526,101.158 81.849,114.481 85.532,114.481 99.248,128.197 103.07,128.197 103.505,127.762 104.775,127.762 105.029,128.016 v1@105.029,129.54
ADC1_INP6: U1.PF12 Um4.4 | length 81.9
  Top Layer w0.2: v1@57.912,63.373 57.658,63.627 57.658,73.914 58.928,75.184 58.928,78.486 58.71,78.704 U1.PF12@58.71,83.636 ; v1(106.045,42.545) 106.07,42.57 Um4.4@108.636,42.57
  Signal Layer 1 w0.2: v1(58.14,63.407) 58.14,63.145 58.547,62.738 58.547,59.748 60.237,58.058 85.129,58.058 100.769,42.418 105.664,42.418 v1@105.791,42.545
ADC1_INP9: U1.PB0 Um3.5 | length 89
  Top Layer w0.2: v1@56.21,77.343 56.21,77.978 56.71,78.478 U1.PB0@56.71,83.636 ; v1(104.059,128.666) 108.244,128.666 108.483,128.905 Um3.5@108.483,130.861
  Signal Layer 1 w0.2: v1(56.434,77.231) 56.434,84.501 68.072,96.139 68.072,101.346 81.661,114.935 85.344,114.935 99.06,128.651 v1@103.886,128.651
ADC2_INP2: U1.PF13 Um5.5 | length 45.9
  Top Layer w0.2: v1(49.215,46.101) 49.276,46.04 49.276,44.643 49.378,44.541 Um5.5@49.378,43.256 ; v1@58.547,65.1 58.42,65.227 58.42,73.914 60.21,75.704 U1.PF13@60.21,83.636
  Signal Layer 1 w0.2: v1@49.276,46.355 49.276,53.721 53.64,58.085 53.64,62.022 56.549,64.931 v1(58.648,64.931)
ADC2_INP3: U1.PA6 Um2.4 | length 54.4
  Top Layer w0.2: Um2.4@20.142,61.443 22.581,61.443 v1(22.606,61.468) ; v1@53.721,65.024 54.71,66.013 54.71,67.591 54.045,68.256 54.045,80.08 54.71,80.745 U1.PA6@54.71,83.636
  Signal Layer 1 w0.2: v1(22.606,61.468) 46.99,61.468 50.434,64.912 v1(53.568,64.912)
ADC2_INP6: U1.PF14 Um5.4 | length 47.5
  Top Layer w0.2: Um5.4@50.698,43.256 50.698,45.933 v1(50.739,45.974) ; v1@59.182,66.322 58.928,66.576 58.928,73.66 60.71,75.442 U1.PF14@60.71,83.636
  Signal Layer 1 w0.2: v1@50.673,46.228 49.676,47.225 49.676,53.486 54.102,57.912 54.102,61.918 56.341,64.157 59.585,64.157 59.817,64.389 59.817,65.405 59.41,65.812 v1(59.41,66.201)
ADC3_INP1: U1.PC3 Um2.5 | length 49.9
  Top Layer w0.2: Um2.5@20.142,62.763 20.147,62.768 v1(22.606,62.768) ; v1@45.466,89.408 46.736,89.408 47.033,89.111 U1.PC3@50.235,89.111
  Signal Layer 1 w0.2: v1@22.352,62.865 21.844,63.373 21.844,72.009 22.479,72.644 26.289,72.644 26.416,72.771 26.416,75.057 32.404,81.045 34.759,81.045 35.434,81.719 37.593,81.719 38.343,82.469 39.751,82.469 42.78,85.498 42.78,87.484 44.557,89.261 v1(45.338,89.261)
ADC3_INP2: U1.PF9 Um1.4 | length 44.1
  Top Layer w0.2: U1.PF9@50.235,93.111 53.646,93.111 v1@53.753,93.218 ; Um1.4@53.569,133.528 53.568,132.588 53.734,132.422 v1(53.734,132.099)
  Signal Layer 1 w0.2: v1@53.779,132.022 54.045,131.756 v1(54.045,93.091)
ADC3_INP3: U1.PF7 Um1.5 | length 47.3
  Top Layer w0.2: U1.PF7@50.235,94.111 v1@52.828,94.111 ; Um1.5@54.889,133.528 54.889,132.69 55.512,132.067 v1(55.512,131.972)
  Signal Layer 1 w0.2: v1(53.029,94.234) 53.029,94.939 53.594,95.504 53.594,130.302 52.705,131.191 52.705,132.842 53.086,133.223 54.864,133.223 55.499,132.588 v1@55.499,132.099
AGND: C22.1 C23.1 C24.1 C25.1 Ppwr.3 R11.1 U1.VSSA | length 115.5
  Top Layer w0.2: v1(26.811,80.445) 26.811,68.439 28.429,66.821 29.718,66.821 30.099,66.44 34.258,66.44 35.509,67.691 v1(37.211,67.691) 37.211,70.434 R11.1@37.262,70.485 37.719,70.485 38.354,71.12 ; C22.1@38.354,72.908 38.354,71.12 ; C25.1@41.021,72.781 41.021,71.455 40.686,71.12 38.354,71.12 ; C23.1@46.99,71.069 C23.1@47.066,70.993 ; v1@47.244,69.596 47.244,70.815 C23.1@47.066,70.993 ; U1.VSSA@50.235,88.111 51.308,88.111 51.562,87.857 51.562,85.217 50.927,84.582 50.927,71.12 50.8,70.993 C24.1@49.657,70.993 C23.1@47.066,70.993
  Signal Layer 1 w0.2: v1@37.211,67.31 37.211,66.802 40.005,64.008 v1(47.095,64.008)
  Signal Layer 2 w0.2: Ppwr.3@10.922,109.728 15.367,109.728 25.273,99.822 25.273,81.954 v1@26.709,80.518 ; v1@46.863,63.866 46.497,63.866 45.271,65.092 45.271,68.6 45.983,69.312 v1(47.214,69.312)
BOTCONN1: Pbot.1 U1.PA3 | length 54.7
  Top Layer w0.2: v1(50.465,63.627) 50.465,64.054 52.206,65.795 U1.PA3@52.206,83.636 ; v1(50.973,59.309) 50.973,56.977 51.308,56.642 55.753,56.642 56.261,56.134 Pbot.1@56.261,34.544
  Signal Layer 1 w0.2: v1@50.546,63.5 50.973,63.073 v1(50.973,59.309)
BOTCONN2: Pbot.2 U1.PA4 | length 54.5
  Top Layer w0.2: v1@51.943,64.054 51.816,64.181 51.816,64.643 52.66,65.487 52.66,80.092 53.71,81.142 U1.PA4@53.71,83.636 ; v1(52.07,58.547) 52.07,57.404 52.378,57.096 55.941,57.096 56.715,56.322 56.715,38.891 58.801,36.805 Pbot.2@58.801,34.544
  Signal Layer 1 w0.2: v1(51.989,63.769) 51.989,58.628 v1@52.024,58.628
BOTCONN4: Pbot.4 U1.PB2 | length 55.3
  Top Layer w0.2: v1(55.88,58.928) 55.88,57.799 57.169,56.51 57.169,39.079 58.656,37.592 62.23,37.592 63.881,35.941 Pbot.4@63.881,34.544 ; v1@55.88,62.484 56.664,63.268 56.664,69.097 56.388,69.373 56.388,74.168 57.912,75.692 57.912,78.047 57.71,78.249 U1.PB2@57.71,83.636
  Signal Layer 1 w0.2: v1@55.854,59.081 v1(55.854,62.245)
BOTCONN5: Pbot.5 U1.PF15 | length 55.9
  Top Layer w0.2: v1@59.817,68.072 59.817,68.199 59.563,68.453 59.563,73.533 61.21,75.18 U1.PF15@61.21,83.636 ; v1(60.452,59.182) 60.198,58.928 60.198,38.481 60.579,38.1 64.008,38.1 66.421,35.687 Pbot.5@66.421,34.544
  Signal Layer 1 w0.2: v1(59.918,67.852) 59.918,67.463 60.452,66.929 60.452,63.373 58.947,61.868 58.947,60.052 59.817,59.182 v1@60.198,59.182
BOTCONN6: Pbot.6 U1.PE9 | length 51.8
  Top Layer w0.2: U1.PE9@63.71,83.636 63.71,65.195 64.996,63.909 65.9,63.909 v1@66.04,63.769
  Signal Layer 2 w0.2: v1(66.354,63.866) 67.437,62.783 67.437,36.449 68.961,34.925 Pbot.6@68.961,34.544
BOTCONN7: Pbot.7 U1.PE10 | length 52.2
  Top Layer w0.2: U1.PE10@65.21,83.636 65.21,65.346 65.532,65.024 v1@66.04,65.024
  Signal Layer 2 w0.2: v1(66.287,65.17) 68.199,63.258 68.199,37.592 71.247,34.544 Pbot.7@71.501,34.544
BOTCONN8: Pbot.8 U1.PE15 | length 51.7
  Top Layer w0.2: U1.PE15@67.71,83.636 67.71,72.117 v1@67.945,71.882
  Signal Layer 2 w0.2: v1(67.965,71.892) 69.107,70.75 69.107,42.907 69.977,42.037 69.977,38.989 74.041,34.925 Pbot.8@74.041,34.544
ETH_CRS_DV: Prmii.8 U1.PA7 | length 63.2
  Top Layer w0.2: v1@38.227,40.64 37.829,40.64 37.584,40.885 37.584,55.223 44.972,62.611 53.522,62.611 55.21,64.299 55.21,68.107 54.61,68.707 54.61,78.648 55.21,79.248 U1.PA7@55.21,83.636
  Signal Layer 1 w0.2: Prmii.8@33.655,36.83 33.655,37.973 36.322,40.64 v1(38.354,40.64)
ETH_MDC: Prmii.10 U1.PC1 | length 64.5
  Top Layer w0.2: 43.815,63.5 43.815,70.153 42.672,71.296 42.672,89.58 43.643,90.551 46.724,90.551 47.164,90.111 U1.PC1@50.235,90.111
  Top Layer w0.254: Prmii.10@36.195,36.83 36.195,55.88 43.815,63.5
ETH_MDIO: Prmii.9 U1.PA2 | length 59
  Top Layer w0.2: Prmii.9@36.195,34.29 37.465,35.56 37.465,37.922 38.1,38.557 38.1,39.727 37.13,40.697 37.13,55.411 44.75,63.031 44.75,63.887 44.723,63.914 44.723,76.6 45.212,77.089 45.212,82.423 48.4,85.611 U1.PA2@50.235,85.611
ETH_REF_CLK: Prmii.7 U1.PA1 | length 61.8
  Top Layer w0.2: v1(37.211,39.243) 37.211,39.497 36.676,40.032 36.676,55.599 44.296,63.219 44.296,63.699 44.269,63.726 44.269,82.046 48.334,86.111 U1.PA1@50.235,86.111
  Signal Layer 1 w0.2: Prmii.7@33.655,34.29 33.782,34.29 35.052,35.56 37.211,35.56 37.465,35.814 37.465,38.354 37.211,38.608 v1(37.211,39.243)
ETH_RXD0: Prmii.5 U1.PC4 | length 67.3
  Top Layer w0.2: v1@38.608,41.656 38.481,41.656 38.038,42.099 38.038,55.035 45.16,62.157 53.71,62.157 55.71,64.157 55.71,68.249 55.118,68.841 55.118,69.435 55.099,69.454 55.099,78.467 55.71,79.078 U1.PC4@55.71,83.636
  Signal Layer 1 w0.2: Prmii.5@31.115,34.29 31.242,34.29 32.385,35.433 32.385,37.465 36.703,41.783 v1(38.989,41.783)
ETH_RXD1: Prmii.6 U1.PC5 | length 64.4
  Top Layer w0.2: v1@38.838,43.053 38.492,43.399 38.492,54.847 45.348,61.703 53.898,61.703 54.031,61.836 54.032,61.835 54.045,61.835 56.21,64 56.21,68.909 55.499,69.62 55.499,78.016 56.21,78.727 U1.PC5@56.21,83.636
  Signal Layer 1 w0.2: Prmii.6@31.115,36.83 31.115,37.084 37.084,43.053 v1(39.116,43.053)
ETH_TX_EN: Prmii.3 U1.PB11 | length 82.2
  Top Layer w0.2: v1@39.493,44.573 38.946,45.12 38.946,54.659 45.501,61.214 68.199,61.214 68.71,61.725 68.71,67.203 69.088,67.581 69.088,70.131 69.596,70.639 69.596,77.272 68.71,78.158 U1.PB11@68.71,83.636
  Signal Layer 1 w0.2: Prmii.3@28.575,34.29 28.956,34.29 29.845,35.179 29.845,37.846 30.226,38.227 31.496,38.227 37.719,44.45 v1(39.37,44.45)
ETH_TXD0: Prmii.4 U1.PB12 | length 84.7
  Top Layer w0.2: v1@39.878,45.72 39.624,45.72 39.4,45.944 39.4,54.471 45.635,60.706 68.453,60.706 68.58,60.833 70.866,60.833 72.644,62.611 72.644,83.566 71.685,84.525 U1.PB12@71.685,85.611
  Signal Layer 1 w0.2: Prmii.4@28.575,36.83 28.575,37.719 29.845,38.989 31.496,38.989 38.1,45.593 v1(40.005,45.593)
ETH_TXD1: Prmii.1 U1.PB13 | length 89.6
  Top Layer w0.2: v1@40.005,46.863 39.854,47.014 39.854,54.283 45.769,60.198 68.707,60.198 68.888,60.379 71.174,60.379 73.152,62.357 73.152,83.7 72.898,83.954 72.898,85.979 72.766,86.111 U1.PB13@71.685,86.111
  Signal Layer 1 w0.2: Prmii.1@26.035,34.29 27.305,35.56 27.305,37.338 29.464,39.497 31.362,39.497 38.728,46.863 v1(40.305,46.863)